# Altium PCB OP-Amplifier.PcbDoc
Units mm, origin at the board's own origin, x right, y up, seen from the top; angles counter-clockwise.
Board outline 61.47 x 83.82 mm, 2 copper layers (Top Layer, Bottom Layer), stack 1.569 mm thick; 12 components, 8 nets, 32 pads, 1 vias.
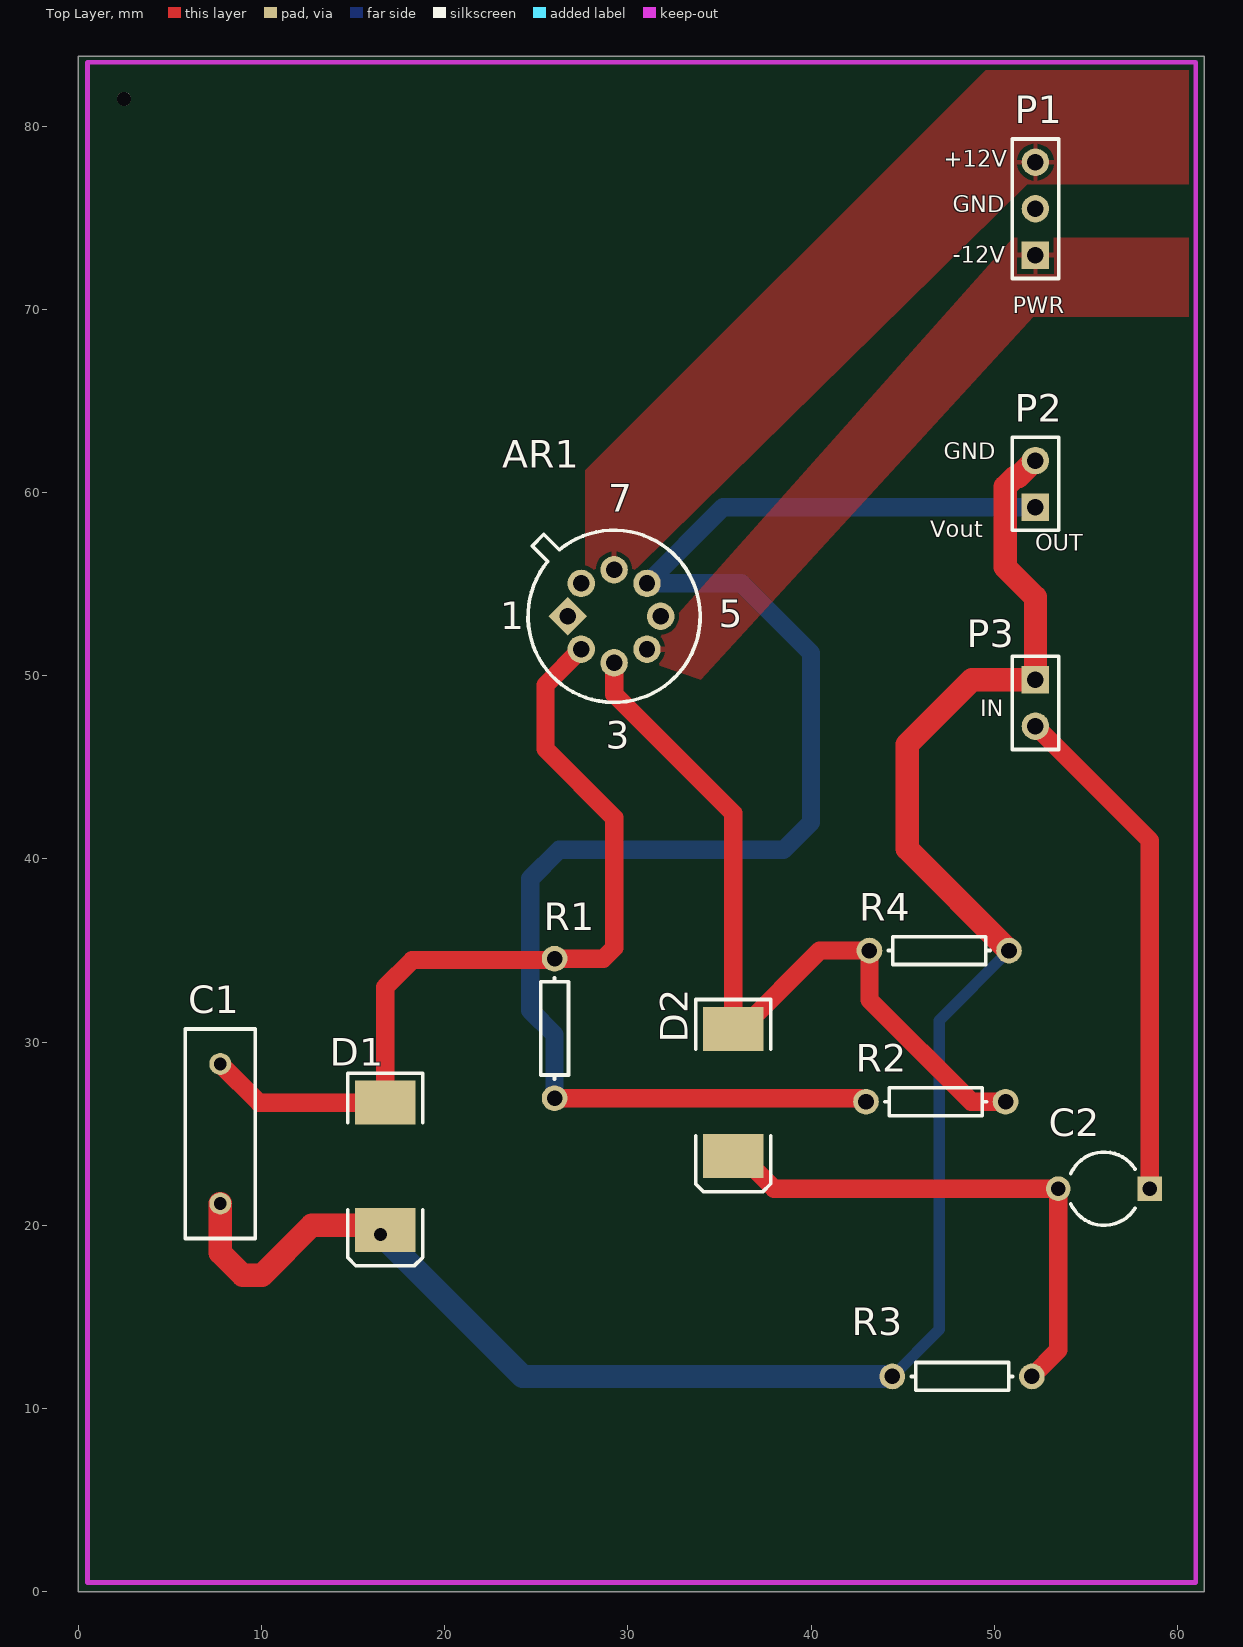
[diagram p0: Top Layer view]
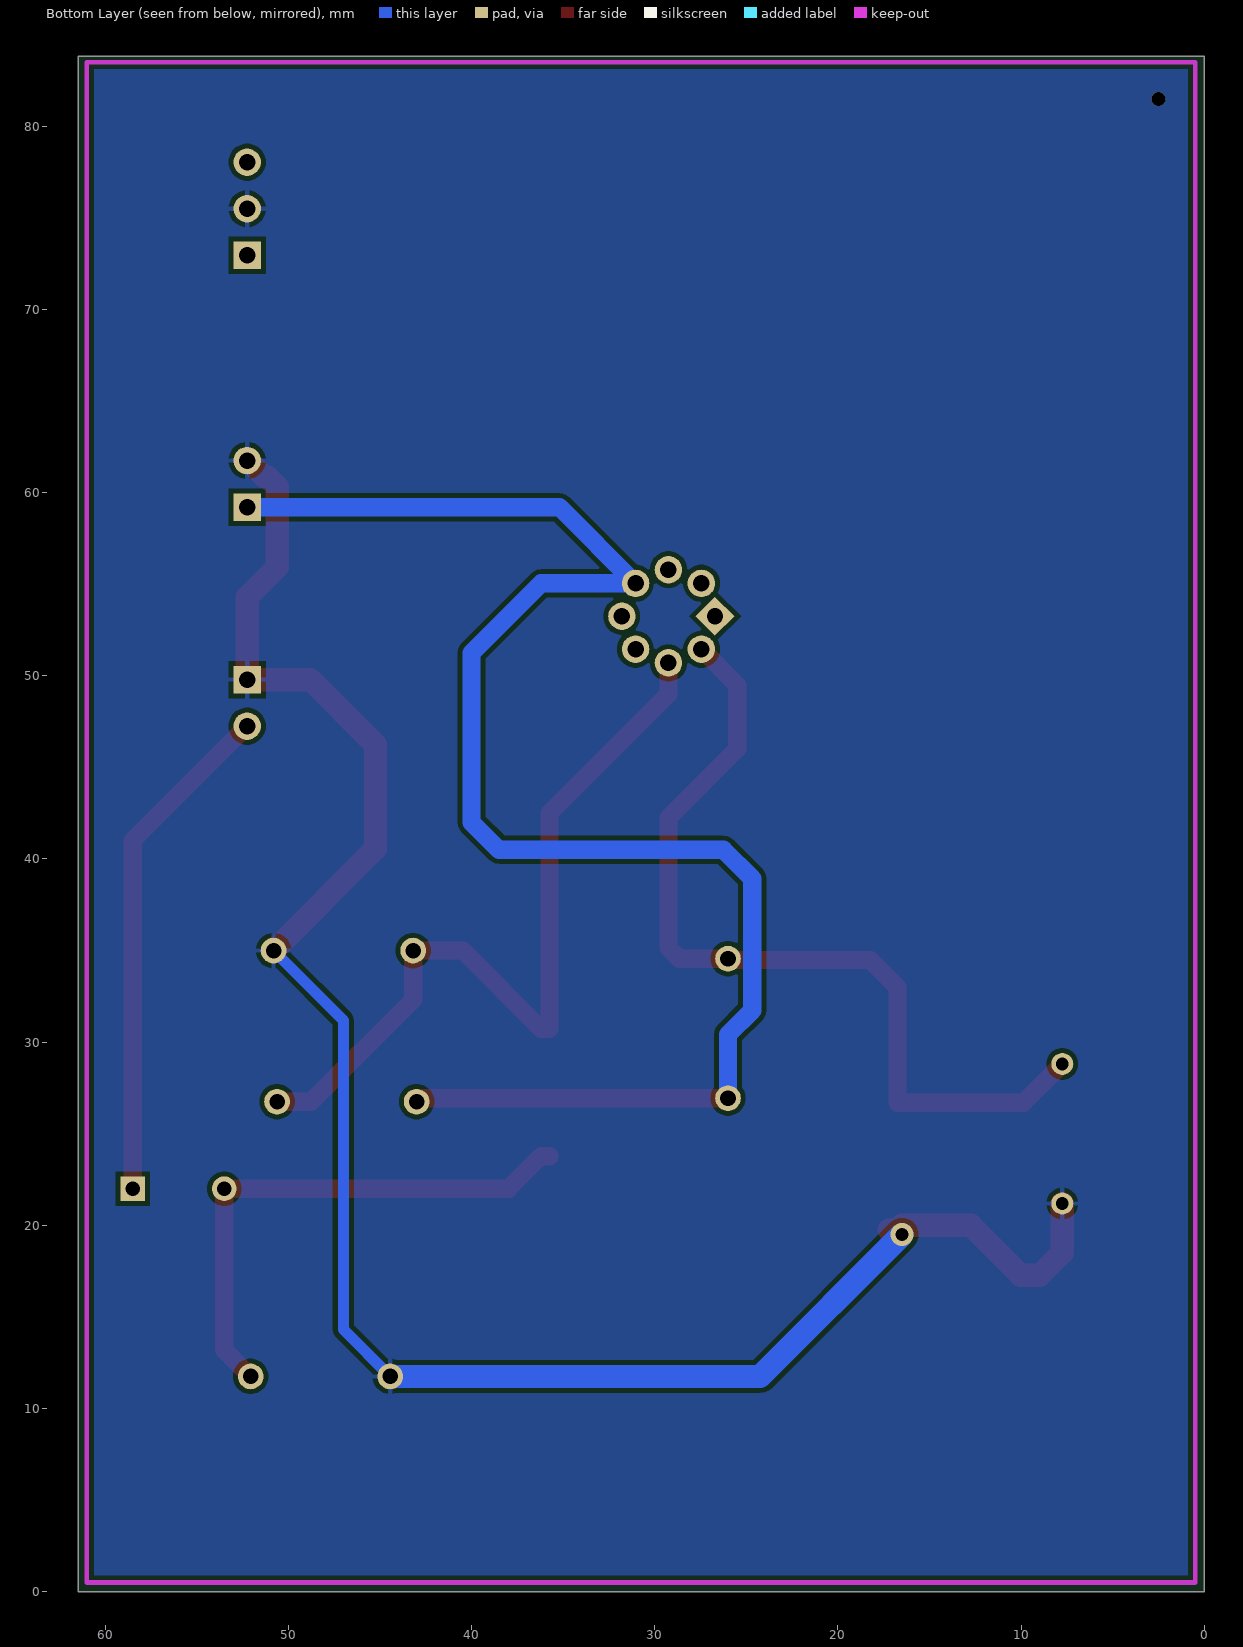
[diagram p1: Bottom Layer view, seen from below]

## Layer stack, top to bottom
Top Solder: solder mask 0.0254, SM-001, Dk 4
Top Layer: signal copper 0.035
Dielectric 1: core 1.4986, Core-043, Dk 4.3
Bottom Layer: signal copper 0.035
Bottom Solder: solder mask 0.0254, SM-001, Dk 4

## Board outline
0,0 61.468,0 61.468,83.82 0,83.82

## Design rules (kind name [scope] priority, off if disabled: settings)
Clearance Clearance_POWER [InNetClass('POWER_nets')] p1: gap=0.254 ignorepadtopadclearanceinfootprint=FALSE
Clearance [All] p2: gap=0.127 ignorepadtopadclearanceinfootprint=FALSE
MinimumSolderMaskSliver [All] p1: minsoldermaskwidth=0.102
PasteMaskExpansion [All] p1: expansion=0.102
PolygonConnect [All] p1: connectstyle=Relief reliefconductorwidth=0.254 reliefentries=4 polygonreliefangle="90 Angle" airgapwidth=0.254
RoutingVias [All] p1: holewidth=0.4 width=0.75 viastyle="Through Hole" minholewidth=0.3 minwidth=0.7 maxholewidth=0.7 maxwidth=1.2
SilkToSilkClearance [All] p1: silktosilkclearance=0.102
SilkToSolderMaskClearance [IsPad] p1: minsilkscreentomaskgap=0.102 clearancetoexposedcopper=TRUE
SolderMaskExpansion [All] p1: expansion=0.102 istentingtop=FALSE
Width Width_Power [InNetClass('POWER_nets')] p1: maxlimit=1.27 minlimit=0.508 preferedwidth=0.61
Width [All] p2: maxlimit=1 minlimit=0.381 preferedwidth=0.381
26 further rules are at their usual default settings.

## Classes and differential pairs
net class POWER_nets: +12V -12V GND

## Components (designator, comment, footprint, x,y, rotation, side; value= is the part's Value field where it differs from the comment)
AR1 "Op Amp" H-08A 29.25,53.25 r0 top
C1 "Cap" RAD-0.3 7.75,25 r270 top value=100µF
C2 "Cap2" CAPR5-4X5 56,22 r180 top value=100pF
D1 "Diode" SMC 16.75,23.225 r270 top
D2 "Diode" SMC 35.75,27.25 r270 top
P1 "Header 3" HDR1X3 52.25,72.96 r90 top
P2 "Header 2" HDR1X2 52.25,59.21 r90 top
P3 "Header 2" HDR1X2 52.25,49.79 r270 top
R1 "Res1" AXIAL-0.3 26,30.75 r270 top value=1K
R2 "Res1" AXIAL-0.3 46.81,26.75 r0 top value=1K
R3 "Res1" AXIAL-0.3 48.25,11.75 r180 top value=1K
R4 "Res1" AXIAL-0.3 47,35 r0 top value=1K

## Footprints (in the part's own frame and the unit in brackets; to place one, negate y for a bottom-side part, rotate by r counter-clockwise, add the part's x,y. Pads: shape width x height; smd on the part's side, far side on the other; paste and mask are expansions set on the pad)
AXIAL-0.3 [mm] "Axial Device, Thru-Hole; 2 Leads; 0.3 in Pin Spacing"
  round 1.4 hole 0.85: 1(-3.81,0) 2(3.81,0)
  silkscreen extent -2.77,-0.76 2.77,0.76
CAPR5-4X5 [mm] "Capacitor; 2 Leads"
  rect 1.35x1.35 hole 0.8: 1(-2.5,0)
  round 1.35 hole 0.8: 2(2.5,0)
  silkscreen extent -1.69,-2 1.82,2
H-08A [mm] "Can; 8 Leads; Pin Circle Dia. 5.08 mm; Lead Dia. 0.53 mm (max)"
  rect 1.5x1.5 hole 0.9 rot 45: 1(-2.54,0)
  round 1.5 hole 0.9: 2(-1.796,-1.796) 3(0,-2.54) 4(1.796,-1.796) 5(2.54,0) 6(1.796,1.796) 7(0,2.54) 8(-1.796,1.796)
  silkscreen extent -4.7,-4.7 4.7,4.7
HDR1X2 [mm] "Connector; Header; 2 Position"
  rect 1.5x1.5 hole 0.9: 1(0,0)
  round 1.5 hole 0.9: 2(2.54,0)
  silkscreen extent -1.27,-1.27 3.81,1.27
HDR1X3 [mm] "Connector; Header; 3 Position"
  rect 1.5x1.5 hole 0.9: 1(0,0)
  round 1.5 hole 0.9: 2(2.54,0) 3(5.08,0)
  silkscreen extent -1.27,-1.27 6.35,1.27
RAD-0.3 [mm] "Radial Cap, Thru-Hole; 2 Leads; 0.3 in Pin Spacing"
  round 1.2 hole 0.7: 1(-3.81,0) 2(3.81,0)
  silkscreen extent -5.71,-1.91 5.71,1.91
SMC [mm] "DO-214-AB/SMC; 2 C-Bend Leads; Body 7.9 x 5.9 mm, inc. leads (LxW)"
  rect 2.4x3.3 smd: 1(-3.475,0) 2(3.475,0)
  silkscreen extent -5.07,-2.05 5.43,2.05

## Part data
AR1: "FET Operational Amplifier", ComponentLink1Description="Manufacturer Link", ComponentLink1URL=http://www.analog.com/, DatasheetVersion="REV. B", LatestRevisionDate=17-Jul-2002, LatestRevisionNote="Re-released for DXP Platform.", PackageDescription="Can; 8 Leads; Pin Circle Dia. 5.08 mm; Lead Dia. 0.53 mm (max)", PackageReference=H-08A, PackageVersion=1990, Published=8-Jun-2000, Publisher="Altium Limited"
C1 C2: "Capacitor", Publisher="Altium Limited"
  C1: LatestRevisionDate=17-Jul-2002, LatestRevisionNote="Re-released for DXP Platform.", PackageDescription="Radial Cap, Thru-Hole; 2 Leads; 0.3 in Pin Spacing", PackageReference=RAD-0.3, Published=8-Jun-2000
  C2: PackageDescription="Capacitor; 2 Leads", PackageReference=CAPR5-4X5, Published=23-Sep-2002
D1 D2: "Default Diode", Code_JEDEC=DO-214-AB, LatestRevisionDate=17-Jul-2002, LatestRevisionNote="Re-released for DXP Platform.", PackageDescription="DO-214-AB/SMC; 2 C-Bend Leads; Body 7.9 x 5.9 mm, inc. leads (LxW)", PackageReference=SMC, PackageVersion=Sep-1996, Published=8-Jun-2000, Publisher="Altium Limited"
P1: "Header, 3-Pin", LatestRevisionDate=17-Jul-2002, LatestRevisionNote="Re-released for DXP Platform.", Publisher="Altium Limited"
P2 P3: "Header, 2-Pin", LatestRevisionDate=17-Jul-2002, LatestRevisionNote="Re-released for DXP Platform.", Publisher="Altium Limited"
R1 R2 R3 R4: "Resistor", LatestRevisionDate=17-Jul-2002, LatestRevisionNote="Re-released for DXP Platform.", PackageDescription="Axial Device, Thru-Hole; 2 Leads; 0.3 in Pin Spacing", PackageReference=AXIAL-0.3, Published=8-Jun-2000, Publisher="Altium Limited"

## Free pads (board coordinates)
  round 0.762 hole 0.762: 1(2.5,81.5)

## Via types
v1: diameter 1.27, hole 0.711, Top Layer to Bottom Layer, 1 vias

## Nets (pads, with @x,y where several pads share a name; then routed paths per layer and width w, separated by ;. In a path a pad name is that pad's centre, name@x,y a point inside that pad or via, vN(x,y) a via of type N, cw(c..) or ccw(c..) an arc to the next point about the centre after c; other vN are vias at no path point)
+12V: AR1.7 P1.3
-12V: AR1.4 P1.1
GND: C1.2 D1.2 P1.2 P2.2 P3.1 pad.1 R3.2 R4.2 | length 106.4
  Top Layer w1.27: C1.2 7.75,18.5 8.974,17.276 10.026,17.276 12.75,20 16.5,20 D1.2 D1.2@17.2,19.75 ; R4.2 45.25,40.56 45.25,46.25 48.79,49.79 P3.1 52.25,54.297 50.611,55.936 50.611,60.328 51.132,60.849 51.287,60.849 52.188,61.75 P2.2
  Bottom Layer w0.61: R3.2 47,14.31 47,31.19 R4.2
  Bottom Layer w1.27: v1(16.5,19.5) 24.25,11.75 R3.2
NetAR1_2: AR1.2 C1.1 D1.1 R1.1 | length 48.2
  Top Layer w1: C1.1 9.86,26.7 D1.1 16.75,33 18.233,34.483 25.923,34.483 R1.1 28.664,34.56 29.25,35.146 29.25,42.25 25.5,46 25.5,49.5 AR1.2
NetAR1_3: AR1.3 D2.1 R2.2 R4.1 | length 44.3
  Top Layer w1: AR1.3 29.25,49 35.75,42.5 D2.1 36.2,30.725 40.475,35 R4.1 43.19,32.31 48.75,26.75 R2.2
NetC2_2: C2.2 D2.2 R3.1 | length 29.3
  Top Layer w1: D2.2 36.2,23.775 37.975,22 C2.2 53.5,13.19 R3.1
Vin: C2.1 P3.2 | length 27.8
  Top Layer w1: P3.2 58.5,41 C2.1
Vout: AR1.6 P2.1 R1.2 R2.1 | length 88.9
  Top Layer w1: R1.2 42.702,26.94 42.892,26.75 R2.1
  Bottom Layer w1: R1.2 26,30.415 24.673,31.742 24.673,38.923 26.25,40.5 38.5,40.5 40,42 40,51.25 36.204,55.046 AR1.6 35.21,59.21 P2.1
pads on no net: AR1.1 AR1.5 AR1.8

## Polygon pours and split planes (outlines as drawn)
GND on Bottom Layer "GND_L02_P000" (solid, pour order 0): 61,83.5 0.5,83.5 0.5,0.5 61,0.5
-12V on Top Layer "-12V_L01_P019" (solid, pour order 19): 60.706,73.914 51.054,73.914 30.594,50.947 33.989,49.788 52.123,69.596 60.706,69.596
+12V on Top Layer "+12V_L01_P006" (solid, pour order 6): 60.706,83.058 60.706,76.84 51.816,76.84 27.686,53.102 27.686,61.214 49.53,83.058

## Keep-outs
Keep-Out Layer:
  lines w0.254: 0.5,0.5 0.5,83.5 47.75,83.5 61,83.5 61,0.5 0.5,0.5

## Silkscreen, mask and mechanical layers (free items; w line width, h text height)
Top Overlay:
  text "+12V" at 47.25,77.5 h1.52
  text "GND" at 47.75,75.018 h1.52
  text "-12V" at 47.75,72.25 h1.52
  text "PWR" at 51,69.5 h1.52
  text "GND" at 47.25,61.518 h1.52
  text "Vout" at 46.5,57.266 h1.52
  text "OUT" at 52.25,56.518 h1.52
  text "IN" at 49.25,47.5 h1.52
Mechanical 1:
  the board outline again, w0.254

## Text inside footprints (layer, text, board x,y; h text height)
AR1: Top Overlay "1" at 23.03,52.554 h1.5; Top Overlay "3" at 28.781,46.03 h1.5; Top Overlay "5" at 34.962,52.661 h1.5; Top Overlay "7" at 28.918,58.95 h1.5